# Altium PCB Controller R2.PcbDoc (part 2 of 3)
Units mil, origin at the board's own origin, x right, y up, seen from the top; angles counter-clockwise.
Board outline 3149.61 x 3149.61 mil, 4 copper layers (Top Layer, Inner 1, Inner 2, Bottom Layer), stack 70.112 mil thick; 128 components, 120 nets, 594 pads, 1557 vias.
Unrouted connection lines stored in the file: 130.
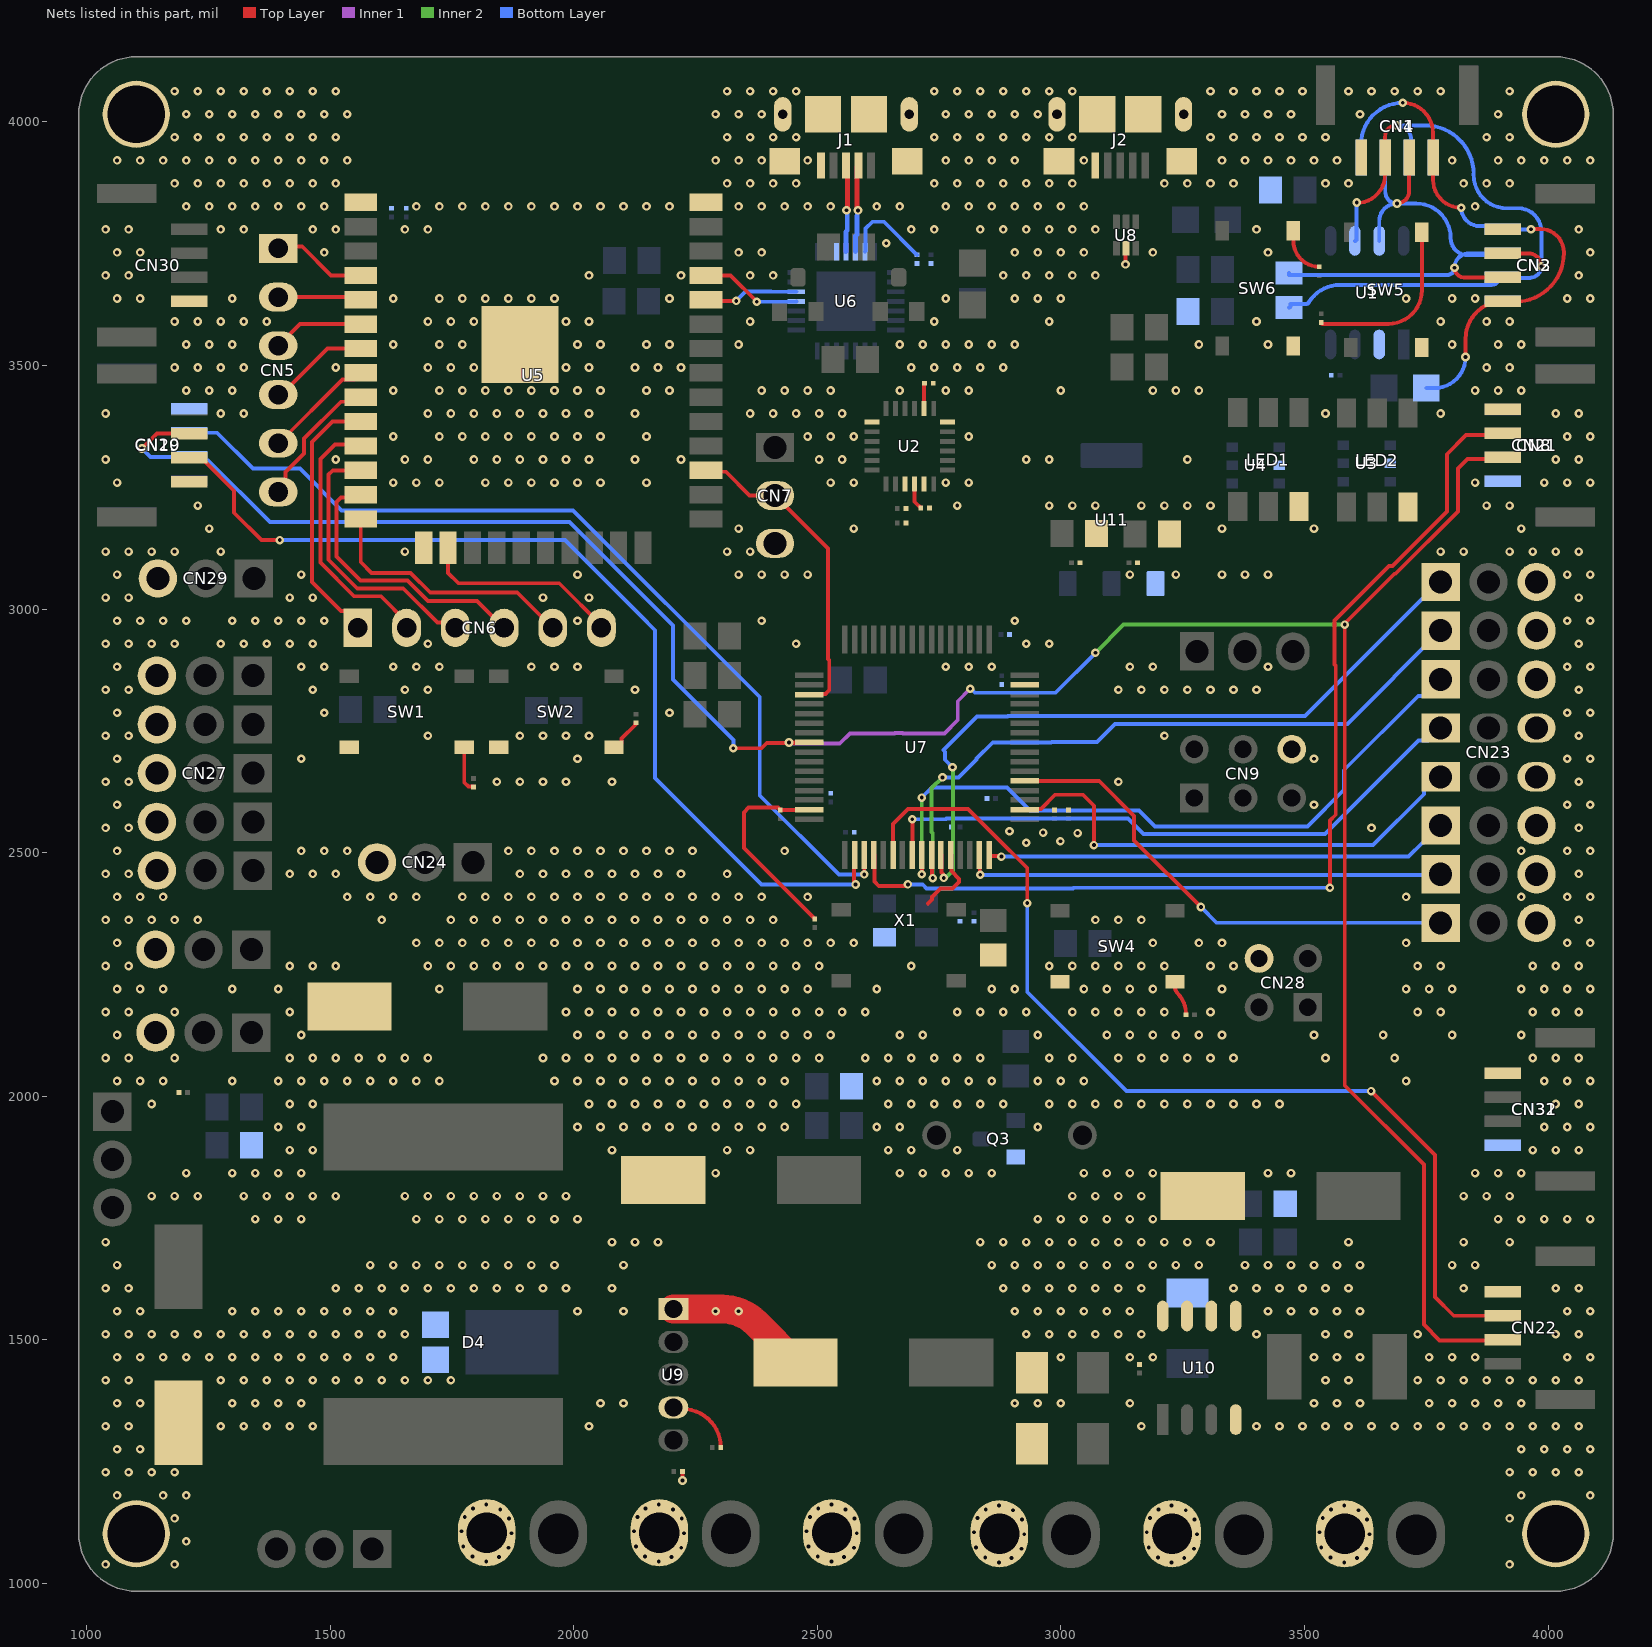
[diagram p4: the nets of this part, all layers, seen from the top]

## Via types
v1: diameter 17.72/17.72/17.72/17.72 (per signal layer), hole 7.87, Top Layer to Bottom Layer, tented both sides, 1234 vias
v2: diameter 17.72, hole 7.87, Top Layer to Bottom Layer, tented both sides, 176 vias
v3: diameter 10.87, hole 7.87, Top Layer to Bottom Layer, 138 vias
v4: diameter 10.87, hole 7.87, Top Layer to Bottom Layer, tented both sides, 6 vias
v5: diameter 50, hole 28, Top Layer to Bottom Layer, tented both sides, 2 vias
v6: diameter 78.74, hole 39.37, Top Layer to Bottom Layer, tented both sides, 1 vias

## Nets (pads, with @x,y where several pads share a name; then routed paths per layer and width w, separated by ;. In a path a pad name is that pad's centre, name@x,y a point inside that pad or via, vN(x,y) a via of type N, cw(c..) or ccw(c..) an arc to the next point about the centre after c; other vN are vias at no path point) (continued)
ESP_RX0: U5.34 U6.26 | length 194.2
  Top Layer w8: U5.34@2271.65,3635.04 2273.82,3632.87 v2(2333.66,3632.87)
  Bottom Layer w8: v2(2333.66,3632.87) 2352.55,3651.76 2405.26,3651.76 2405.45,3651.57 U6.26@2457.09,3651.57
ESP_TX: CN7.2 U5.27 U7.51 | length 653.4
  Top Layer w8: U5.27@2271.65,3285.04 2274.64,3282.06 2312.43,3282.06 2361.22,3233.27 CN7.2@2413.39,3233.27 2522.2,3124.46 2522.2,2897.97 2524.72,2895.44 2524.72,2834.06 2516.69,2826.04 2485.22,2826.04 U7.51@2483.72,2824.54
ESP_TX0: U5.35 U6.25 | length 208.3
  Top Layer w8: U5.35@2271.65,3685.04 2321.85,3685.04 v2(2375.98,3630.91)
  Bottom Layer w8: v2(2375.98,3630.91) 2456.1,3630.91 U6.25@2457.09,3631.89
ESP_USB_N: J1.2 U6.5 | length 180.6
  Top Layer w9.84: v2(2583.71,3818.57) 2582.2,3820.07 2582.2,3823.39 2581.77,3823.82 2581.77,3907.56 J1.2@2584.65,3910.43
  Bottom Layer w9.84: U6.5@2578.74,3733.86 2578.74,3766.34 2581.52,3769.12 2581.52,3807.02 2582.2,3807.7 2582.2,3817.06 v2(2583.71,3818.57)
ESP_USB_P: J1.3 U6.4 | length 180.5
  Top Layer w9.84: J1.3@2559.06,3910.43 2561.93,3907.56 2561.93,3823.82 2561.5,3823.39 2561.5,3820.4 v2(2559.99,3818.9)
  Bottom Layer w9.84: U6.4@2559.06,3733.86 2558.9,3734.02 2558.9,3774.56 2561.68,3777.34 2561.68,3807.18 2561.5,3807.37 2561.5,3817.39 v2(2559.99,3818.9)
GND: C1.1 C2.1 C3.1 C4.1 C5.1 C6.1 C7.1 C8.1 C9.1 C12.1 C13.1 C14.1 C15.1 C16.1 C17.1 C18.1 C19.1 C20.1 C21.1 C22.1 C23.2 C28.1 C29.2 C30.1 C31.1 C32.1 C33.1 C34.2 C35.2 C36.2 C38.1 C39.1 C40.1 C41.1 C42.2 CN1.4 CN2.4 CN3.4 CN4.4 CN7.3 CN8.4 CN9.6 CN10.K CN14.K CN15.K CN16.K CN17.K CN18.K CN19.4 CN20.4 CN21.4 CN22.4 CN23.N CN24.3 CN27.N CN28.4 CN29.3 CN30.4 CN31.4 CN32.4 D4.1 D4.2 D5.A J1.5 J1.S J2.5 J2.S LED1.3 LED2.3 pad.1@1102.36,4015.75 pad.2@4015.75,4015.75 pad.3@1141.73,2130.91 pad.3@1141.73,2301.18 pad.3@4015.75,1102.36 pad.4 Q3.2 R2.1 R11.1 R15.1 R18.2 R21.1 R24.2 SW1.3 SW2.3 SW4.3 SW5.3 SW6.3 U1.2 U2.1 U2.9 U2.11 U2.18 U3.2 U4.2 U5.1 U5.15 U5.38 U6.3 U7.12 U7.31 U7.63 U8.2 U9.1 U10.4 U10.5 U10.6 U10.7 U10.8 U11.1 X1.2 | length 914.7
  Top Layer w8: v2(2223.43,1211.61) 2223.43,1228.54 2222.63,1229.33 2222.63,1229.52 C28.1@2223.43,1230.32 ; U7.63@2483.72,2588.54 2482.79,2587.6 C15.1@2424.21,2587.6 2419.29,2592.52 2359.25,2592.52 2349.41,2582.68 2349.41,2509.84 C23.2@2495.08,2364.17 ; 2727.36,2395.67 2735.91,2404.21 2735.91,2409.01 2753.39,2426.5 2777.87,2426.5 2791.27,2439.89 2791.27,2446.52 2775.22,2462.57 2775.22,2494.04 U7.12@2773.72,2495.54 ; v2(3132.87,3707.68) 3133.06,3707.87 3133.06,3741.94 3133.86,3741.14 U8.2@3133.86,3740.55
  Top Layer w59.06: U9.1@2204.72,1563.39 2304.25,1563.39 cw(c2304.25,1463.39) 2374.96,1534.1 C42.2@2455.32,1453.74
  other v1: 1039.37,1039.37 1181.1,1039.37 3921.26,1039.37 1204.72,1086.61 1181.1,1133.86 3921.26,1133.86 1062.99,1181.1 1157.48,1181.1 1204.72,1181.1 3944.88,1181.1 4086.61,1181.1 1039.37,1228.35 1086.61,1228.35 1133.86,1228.35 1181.1,1228.35 3921.26,1228.35 3968.5,1228.35 4015.75,1228.35 4062.99,1228.35 1062.99,1275.59 1110.24,1275.59 3944.88,1275.59 3992.13,1275.59 4039.37,1275.59 4086.61,1275.59 1039.37,1322.83 1086.61,1322.83 1275.59,1322.83 1322.83,1322.83 1370.08,1322.83 1417.32,1322.83 1464.57,1322.83 2031.5,1322.83 3165.35,1322.83 3401.58,1322.83 3448.82,1322.83 3496.06,1322.83 3543.31,1322.83 3590.55,1322.83 3637.8,1322.83 3685.04,1322.83 3732.28,1322.83 3779.53,1322.83 3826.77,1322.83 3874.02,1322.83 3921.26,1322.83 3968.5,1322.83 4015.75,1322.83 4062.99,1322.83 1062.99,1370.08 1110.24,1370.08 1299.21,1370.08 1346.46,1370.08 1393.7,1370.08 1440.94,1370.08 2055.12,1370.08 2102.36,1370.08 2905.51,1370.08 2952.76,1370.08 3000,1370.08 3141.73,1370.08 3519.69,1370.08 3566.93,1370.08 3614.17,1370.08 3755.91,1370.08 3803.15,1370.08 3850.39,1370.08 3897.64,1370.08 3944.88,1370.08 1039.37,1417.32 1086.61,1417.32 1275.59,1417.32 1322.83,1417.32 1370.08,1417.32 1417.32,1417.32 1464.57,1417.32 1511.81,1417.32 1559.06,1417.32 1606.3,1417.32 1653.54,1417.32 1700.79,1417.32 1748.03,1417.32 3543.31,1417.32 3590.55,1417.32 3732.28,1417.32 3779.53,1417.32 3826.77,1417.32 3874.02,1417.32 3921.26,1417.32 3968.5,1417.32 4015.75,1417.32 4062.99,1417.32 1062.99,1464.57 1110.24,1464.57 1157.48,1464.57 1204.72,1464.57 1251.97,1464.57 1299.21,1464.57 1346.46,1464.57 1393.7,1464.57 1440.94,1464.57 1488.19,1464.57 1535.43,1464.57 1582.68,1464.57 1629.92,1464.57 3000,1464.57 3141.73,1464.57 3188.98,1464.57 3519.69,1464.57 3566.93,1464.57 3614.17,1464.57 3755.91,1464.57 3803.15,1464.57 3850.39,1464.57 4039.37,1464.57 4086.61,1464.57 1039.37,1511.81 1086.61,1511.81 1133.86,1511.81 1181.1,1511.81 1228.35,1511.81 1275.59,1511.81 1322.83,1511.81 1370.08,1511.81 1417.32,1511.81 1464.57,1511.81 1511.81,1511.81 1559.06,1511.81 1606.3,1511.81 1653.54,1511.81 2929.13,1511.81 2976.38,1511.81 3023.62,1511.81 3070.87,1511.81 3118.11,1511.81 3165.35,1511.81 3401.58,1511.81 3543.31,1511.81 3590.55,1511.81 3732.28,1511.81 4015.75,1511.81 4062.99,1511.81 1062.99,1559.06 1110.24,1559.06 1299.21,1559.06 1346.46,1559.06 1393.7,1559.06 1440.94,1559.06 1488.19,1559.06 1535.43,1559.06 1582.68,1559.06 1629.92,1559.06 2007.87,1559.06 2102.36,1559.06 2291.34,1559.06 2338.58,1559.06 2905.51,1559.06 2952.76,1559.06 3000,1559.06 3047.24,1559.06 3094.49,1559.06 3141.73,1559.06 3425.2,1559.06 3472.44,1559.06 3519.69,1559.06 3566.93,1559.06 3614.17,1559.06 4039.37,1559.06 4086.61,1559.06 1039.37,1606.3 1086.61,1606.3 1511.81,1606.3 1559.06,1606.3 1606.3,1606.3 1653.54,1606.3 1700.79,1606.3 1748.03,1606.3 1795.28,1606.3 1842.52,1606.3 1889.76,1606.3 1937.01,1606.3 1984.25,1606.3 2078.74,1606.3 2881.89,1606.3 2929.13,1606.3 2976.38,1606.3 3023.62,1606.3 3070.87,1606.3 3118.11,1606.3 3165.35,1606.3 3354.33,1606.3 3401.58,1606.3 3448.82,1606.3 3496.06,1606.3 3543.31,1606.3 3590.55,1606.3 3826.77,1606.3 4015.75,1606.3 4062.99,1606.3 1062.99,1653.54 1582.68,1653.54 1629.92,1653.54 1677.17,1653.54 1724.41,1653.54 1771.65,1653.54 1818.9,1653.54 1866.14,1653.54 1913.39,1653.54 1960.63,1653.54 2102.36,1653.54 2858.27,1653.54 2905.51,1653.54 2952.76,1653.54 3000,1653.54 3047.24,1653.54 3094.49,1653.54 3141.73,1653.54 3188.98,1653.54 3236.22,1653.54 3283.46,1653.54 3377.95,1653.54 3425.2,1653.54 3472.44,1653.54 3519.69,1653.54 3566.93,1653.54 3614.17,1653.54 3803.15,1653.54 3850.39,1653.54 1039.37,1700.79 2078.74,1700.79 2125.98,1700.79 2173.23,1700.79 2834.65,1700.79 2881.89,1700.79 2929.13,1700.79 2976.38,1700.79 3023.62,1700.79 3070.87,1700.79 3118.11,1700.79 3165.35,1700.79 3212.6,1700.79 3259.84,1700.79 3307.09,1700.79 3590.55,1700.79 3826.77,1700.79 3921.26,1700.79 1346.46,1748.03 1393.7,1748.03 1440.94,1748.03 1677.17,1748.03 1724.41,1748.03 1771.65,1748.03 1818.9,1748.03 1866.14,1748.03 1913.39,1748.03 1960.63,1748.03 2007.87,1748.03 2952.76,1748.03 3000,1748.03 3047.24,1748.03 3094.49,1748.03 3141.73,1748.03 3188.98,1748.03 3897.64,1748.03 3944.88,1748.03 3992.13,1748.03 4039.37,1748.03 4086.61,1748.03 1133.86,1795.28 1181.1,1795.28 1228.35,1795.28 1322.83,1795.28 1370.08,1795.28 1417.32,1795.28 1464.57,1795.28 1511.81,1795.28 1653.54,1795.28 1700.79,1795.28 1748.03,1795.28 1795.28,1795.28 1842.52,1795.28 1889.76,1795.28 1937.01,1795.28 1984.25,1795.28 3023.62,1795.28 3070.87,1795.28 3118.11,1795.28 3165.35,1795.28 3826.77,1795.28 3874.02,1795.28 3921.26,1795.28 1204.72,1842.52 1299.21,1842.52 1346.46,1842.52 1393.7,1842.52 1440.94,1842.52 2291.34,1842.52 2669.29,1842.52 2716.54,1842.52 2763.78,1842.52 2811.02,1842.52 2858.27,1842.52 3047.24,1842.52 3094.49,1842.52 3141.73,1842.52 3188.98,1842.52 3425.2,1842.52 3472.44,1842.52 3850.39,1842.52 3897.64,1842.52 3944.88,1842.52 1417.32,1889.76 1464.57,1889.76 2078.74,1889.76 2314.96,1889.76 2362.2,1889.76 2645.67,1889.76 2692.91,1889.76 2787.4,1889.76 3968.5,1889.76 4015.75,1889.76 4062.99,1889.76 1393.7,1937.01 1440.94,1937.01 2007.87,1937.01 2055.12,1937.01 2102.36,1937.01 2149.61,1937.01 2196.85,1937.01 2244.09,1937.01 2291.34,1937.01 2338.58,1937.01 2385.83,1937.01 2433.07,1937.01 2622.05,1937.01 2669.29,1937.01 2952.76,1937.01 3992.13,1937.01 4039.37,1937.01 4086.61,1937.01 1133.86,1984.25 1417.32,1984.25 1464.57,1984.25 2031.5,1984.25 2078.74,1984.25 2125.98,1984.25 2173.23,1984.25 2220.47,1984.25 2267.72,1984.25 2314.96,1984.25 2362.2,1984.25 2409.45,1984.25 2456.69,1984.25 2645.67,1984.25 2692.91,1984.25 2740.16,1984.25 2787.4,1984.25 2834.65,1984.25 2881.89,1984.25 2976.38,1984.25 3023.62,1984.25 3070.87,1984.25 3118.11,1984.25 3165.35,1984.25 3212.6,1984.25 3259.84,1984.25 3307.09,1984.25 3354.33,1984.25 3401.58,1984.25 3448.82,1984.25 4015.75,1984.25 4062.99,1984.25 1062.99,2031.5 1110.24,2031.5 1157.48,2031.5 1299.21,2031.5 1393.7,2031.5 1440.94,2031.5 1488.19,2031.5 1535.43,2031.5 1582.68,2031.5 1629.92,2031.5 1677.17,2031.5 1724.41,2031.5 1960.63,2031.5 2007.87,2031.5 2055.12,2031.5 2102.36,2031.5 2149.61,2031.5 2196.85,2031.5 2244.09,2031.5 2291.34,2031.5 2338.58,2031.5 2385.83,2031.5 2433.07,2031.5 2622.05,2031.5 2669.29,2031.5 2716.54,2031.5 2763.78,2031.5 2811.02,2031.5 2858.27,2031.5 2952.76,2031.5 3000,2031.5 3047.24,2031.5 3708.66,2031.5 3992.13,2031.5 4039.37,2031.5 4086.61,2031.5 1039.37,2078.74 1086.61,2078.74 1181.1,2078.74 1417.32,2078.74 1464.57,2078.74 1511.81,2078.74 1559.06,2078.74 1606.3,2078.74 1653.54,2078.74 1700.79,2078.74 1937.01,2078.74 1984.25,2078.74 2031.5,2078.74 2078.74,2078.74 2125.98,2078.74 2173.23,2078.74 2220.47,2078.74 2267.72,2078.74 2314.96,2078.74 2362.2,2078.74 2409.45,2078.74 2456.69,2078.74 2503.94,2078.74 2598.43,2078.74 2645.67,2078.74 2692.91,2078.74 2740.16,2078.74 2787.4,2078.74 2834.65,2078.74 2976.38,2078.74 3023.62,2078.74 3118.11,2078.74 3165.35,2078.74 3212.6,2078.74 3259.84,2078.74 3307.09,2078.74 3354.33,2078.74 3543.31,2078.74 3685.04,2078.74 3968.5,2078.74 4015.75,2078.74 4062.99,2078.74 1062.99,2125.98 1440.94,2125.98 2007.87,2125.98 2055.12,2125.98 2102.36,2125.98 2149.61,2125.98 2196.85,2125.98 2244.09,2125.98 2291.34,2125.98 2338.58,2125.98 2385.83,2125.98 2433.07,2125.98 2480.32,2125.98 2527.56,2125.98 2669.29,2125.98 2716.54,2125.98 2952.76,2125.98 3094.49,2125.98 3141.73,2125.98 3188.98,2125.98 3236.22,2125.98 3283.46,2125.98 3330.71,2125.98 3519.69,2125.98 3661.42,2125.98 3803.15,2125.98 3944.88,2125.98 1039.37,2173.23 1086.61,2173.23 1181.1,2173.23 1417.32,2173.23 1984.25,2173.23 2031.5,2173.23 2078.74,2173.23 2125.98,2173.23 2173.23,2173.23 2220.47,2173.23 2267.72,2173.23 2314.96,2173.23 2362.2,2173.23 2409.45,2173.23 2456.69,2173.23 2503.94,2173.23 2551.18,2173.23 2598.43,2173.23 2787.4,2173.23 2834.65,2173.23 2881.89,2173.23 2929.13,2173.23 3023.62,2173.23 3070.87,2173.23 3118.11,2173.23 3165.35,2173.23 3212.6,2173.23 3307.09,2173.23 3732.28,2173.23 3779.53,2173.23 3968.5,2173.23 4015.75,2173.23 4062.99,2173.23 1062.99,2220.47 1110.24,2220.47 1157.48,2220.47 1299.21,2220.47 1393.7,2220.47 1724.41,2220.47 2007.87,2220.47 2055.12,2220.47 2102.36,2220.47 2149.61,2220.47 2196.85,2220.47 2244.09,2220.47 2291.34,2220.47 2338.58,2220.47 2385.83,2220.47 2433.07,2220.47 2480.32,2220.47 2622.05,2220.47 2858.27,2220.47 2905.51,2220.47 3047.24,2220.47 3094.49,2220.47 3141.73,2220.47 3188.98,2220.47 3330.71,2220.47 3708.66,2220.47 3755.91,2220.47 3803.15,2220.47 3944.88,2220.47 3992.13,2220.47 4039.37,2220.47 4086.61,2220.47 1039.37,2267.72 1086.61,2267.72 1417.32,2267.72 1464.57,2267.72 1511.81,2267.72 1700.79,2267.72 1748.03,2267.72 1795.28,2267.72 1842.52,2267.72 1889.76,2267.72 1937.01,2267.72 1984.25,2267.72 2031.5,2267.72 2078.74,2267.72 2125.98,2267.72 2173.23,2267.72 2220.47,2267.72 2267.72,2267.72 2314.96,2267.72 2362.2,2267.72 2409.45,2267.72 2456.69,2267.72 2503.94,2267.72 2692.91,2267.72 2976.38,2267.72 3023.62,2267.72 3070.87,2267.72 3118.11,2267.72 3165.35,2267.72 3212.6,2267.72 3307.09,2267.72 3354.33,2267.72 3732.28,2267.72 3779.53,2267.72 3968.5,2267.72 4015.75,2267.72 4062.99,2267.72 1062.99,2314.96 1677.17,2314.96 1724.41,2314.96 1771.65,2314.96 1818.9,2314.96 1866.14,2314.96 1913.39,2314.96 1960.63,2314.96 2007.87,2314.96 2055.12,2314.96 2102.36,2314.96 2149.61,2314.96 2196.85,2314.96 2244.09,2314.96 2291.34,2314.96 2338.58,2314.96 2385.83,2314.96 2433.07,2314.96 2480.32,2314.96 2527.56,2314.96 2574.8,2314.96 3188.98,2314.96 3283.46,2314.96 3330.71,2314.96 3708.66,2314.96 4039.37,2314.96 4086.61,2314.96 1039.37,2362.2 1086.61,2362.2 1133.86,2362.2 1181.1,2362.2 1228.35,2362.2 1606.3,2362.2 1748.03,2362.2 1795.28,2362.2 1842.52,2362.2 1889.76,2362.2 1937.01,2362.2 1984.25,2362.2 2031.5,2362.2 2078.74,2362.2 2125.98,2362.2 2173.23,2362.2 2220.47,2362.2 2267.72,2362.2 2314.96,2362.2 2362.2,2362.2 2409.45,2362.2 3070.87,2362.2 3118.11,2362.2 3165.35,2362.2 4062.99,2362.2 1062.99,2409.45 1110.24,2409.45 1157.48,2409.45 1535.43,2409.45 1582.68,2409.45 1629.92,2409.45 1677.17,2409.45 1771.65,2409.45 1818.9,2409.45 1866.14,2409.45 1913.39,2409.45 1960.63,2409.45 2007.87,2409.45 2055.12,2409.45 2102.36,2409.45 2149.61,2409.45 2196.85,2409.45 2244.09,2409.45 2291.34,2409.45 2338.58,2409.45 2385.83,2409.45 2480.32,2409.45 3708.66,2409.45 3944.88,2409.45 4039.37,2409.45 4086.61,2409.45 1039.37,2456.69 1086.61,2456.69 1417.32,2456.69 1464.57,2456.69 1511.81,2456.69 1889.76,2456.69 1937.01,2456.69 1984.25,2456.69 2031.5,2456.69 2078.74,2456.69 2125.98,2456.69 2173.23,2456.69 2220.47,2456.69 2314.96,2456.69 4062.99,2456.69 1062.99,2503.94 1440.94,2503.94 1488.19,2503.94 1535.43,2503.94 1866.14,2503.94 1913.39,2503.94 1960.63,2503.94 2007.87,2503.94 2055.12,2503.94 2102.36,2503.94 2149.61,2503.94 2196.85,2503.94 2244.09,2503.94 2433.07,2503.94 3944.88,2503.94 4039.37,2503.94 4086.61,2503.94 1039.37,2551.18 1086.61,2551.18 3637.8,2551.18 4062.99,2551.18 1062.99,2598.43 3519.69,2598.43 4039.37,2598.43 4086.61,2598.43 1039.37,2645.67 1086.61,2645.67 1842.52,2645.67 1889.76,2645.67 1937.01,2645.67 1984.25,2645.67 2078.74,2645.67 3118.11,2645.67 4062.99,2645.67 1062.99,2692.91 1440.94,2692.91 2007.87,2692.91 3519.69,2692.91 4039.37,2692.91 4086.61,2692.91 1039.37,2740.16 1086.61,2740.16 1700.79,2740.16 1889.76,2740.16 1937.01,2740.16 1984.25,2740.16 2031.5,2740.16 3212.6,2740.16 4062.99,2740.16 1062.99,2787.4 1488.19,2787.4 2196.85,2787.4 4039.37,2787.4 4086.61,2787.4 1039.37,2834.65 1086.61,2834.65 1464.57,2834.65 1653.54,2834.65 1700.79,2834.65 2125.98,2834.65 3118.11,2834.65 3165.35,2834.65 3212.6,2834.65 3259.84,2834.65 3307.09,2834.65 3354.33,2834.65 3401.58,2834.65 4062.99,2834.65 1062.99,2881.89 1440.94,2881.89 1488.19,2881.89 1629.92,2881.89 1677.17,2881.89 1724.41,2881.89 1913.39,2881.89 1960.63,2881.89 2007.87,2881.89 2763.78,2881.89 2811.02,2881.89 2858.27,2881.89 3141.73,2881.89 3188.98,2881.89 3425.2,2881.89 4039.37,2881.89 4086.61,2881.89 1039.37,2929.13 1086.61,2929.13 1133.86,2929.13 1181.1,2929.13 1275.59,2929.13 1322.83,2929.13 1370.08,2929.13 1417.32,2929.13 1464.57,2929.13 1700.79,2929.13 2456.69,2929.13 2929.13,2929.13 2976.38,2929.13 4062.99,2929.13 1062.99,2976.38 1110.24,2976.38 1157.48,2976.38 1204.72,2976.38 1299.21,2976.38 1346.46,2976.38 1393.7,2976.38 1440.94,2976.38 1488.19,2976.38 2007.87,2976.38 2385.83,2976.38 2905.51,2976.38 4039.37,2976.38 4086.61,2976.38 1039.37,3023.62 1086.61,3023.62 1417.32,3023.62 1464.57,3023.62 1937.01,3023.62 2031.5,3023.62 4062.99,3023.62 1062.99,3070.87 1440.94,3070.87 2007.87,3070.87 2338.58,3070.87 2385.83,3070.87 2433.07,3070.87 2480.32,3070.87 3141.73,3070.87 3236.22,3070.87 3330.71,3070.87 3377.95,3070.87 3425.2,3070.87 4039.37,3070.87 4086.61,3070.87 1039.37,3118.11 1086.61,3118.11 1133.86,3118.11 1181.1,3118.11 1275.59,3118.11 1653.54,3118.11 2314.96,3118.11 2362.2,3118.11 3779.53,3118.11 3826.77,3118.11 3921.26,3118.11 3968.5,3118.11 4015.75,3118.11 4062.99,3118.11 1251.97,3165.35 2338.58,3165.35 2574.8,3165.35 3330.71,3165.35 3519.69,3165.35 3944.88,3165.35 1228.35,3212.6 2787.4,3212.6 2976.38,3212.6 3023.62,3212.6 3070.87,3212.6 3165.35,3212.6 3212.6,3212.6 3259.84,3212.6 3307.09,3212.6 3874.02,3212.6 3921.26,3212.6 1062.99,3259.84 1629.92,3259.84 1677.17,3259.84 1724.41,3259.84 1818.9,3259.84 1866.14,3259.84 1913.39,3259.84 1960.63,3259.84 2007.87,3259.84 2055.12,3259.84 2149.61,3259.84 2527.56,3259.84 2574.8,3259.84 2763.78,3259.84 2811.02,3259.84 3850.39,3259.84 3992.13,3259.84 4039.37,3259.84 4086.61,3259.84 1039.37,3307.09 1511.81,3307.09 1653.54,3307.09 1700.79,3307.09 1795.28,3307.09 1842.52,3307.09 1889.76,3307.09 1937.01,3307.09 1984.25,3307.09 2031.5,3307.09 2125.98,3307.09 2220.47,3307.09 2503.94,3307.09 2551.18,3307.09 2929.13,3307.09 2976.38,3307.09 3259.84,3307.09 4015.75,3307.09 4062.99,3307.09 1629.92,3354.33 1724.41,3354.33 1771.65,3354.33 1818.9,3354.33 1866.14,3354.33 1913.39,3354.33 1960.63,3354.33 2007.87,3354.33 2055.12,3354.33 2149.61,3354.33 2480.32,3354.33 2527.56,3354.33 2574.8,3354.33 2811.02,3354.33 4039.37,3354.33 4086.61,3354.33 1039.37,3401.58 1275.59,3401.58 1322.83,3401.58 1700.79,3401.58 1748.03,3401.58 1795.28,3401.58 1842.52,3401.58 1889.76,3401.58 1937.01,3401.58 1984.25,3401.58 2031.5,3401.58 2125.98,3401.58 2362.2,3401.58 2409.45,3401.58 2456.69,3401.58 2503.94,3401.58 2551.18,3401.58 3543.31,3401.58 3779.53,3401.58 4015.75,3401.58 4062.99,3401.58 1204.72,3448.82 1251.97,3448.82 1299.21,3448.82 1629.92,3448.82 1724.41,3448.82 1771.65,3448.82 1818.9,3448.82 1866.14,3448.82 1913.39,3448.82 1960.63,3448.82 2007.87,3448.82 2055.12,3448.82 2149.61,3448.82 2196.85,3448.82 2385.83,3448.82 2433.07,3448.82 2480.32,3448.82 2527.56,3448.82 2669.29,3448.82 2763.78,3448.82 2811.02,3448.82 3000,3448.82 3188.98,3448.82 3236.22,3448.82 3283.46,3448.82 3850.39,3448.82 3897.64,3448.82 3944.88,3448.82 1181.1,3496.06 1228.35,3496.06 1275.59,3496.06 1322.83,3496.06 1511.81,3496.06 1700.79,3496.06 1748.03,3496.06 1795.28,3496.06 1984.25,3496.06 2031.5,3496.06 2125.98,3496.06 2173.23,3496.06 2220.47,3496.06 2692.91,3496.06 2740.16,3496.06 2787.4,3496.06 2834.65,3496.06 2881.89,3496.06 3874.02,3496.06 3921.26,3496.06 1204.72,3543.31 1251.97,3543.31 1299.21,3543.31 1629.92,3543.31 1724.41,3543.31 1771.65,3543.31 2007.87,3543.31 2055.12,3543.31 2149.61,3543.31 2196.85,3543.31 2338.58,3543.31 2669.29,3543.31 2716.54,3543.31 2763.78,3543.31 2811.02,3543.31 2858.27,3543.31 2905.51,3543.31 3283.46,3543.31 3425.2,3543.31 3803.15,3543.31 3897.64,3543.31 3944.88,3543.31 1181.1,3590.55 1228.35,3590.55 1275.59,3590.55 1322.83,3590.55 1370.08,3590.55 1700.79,3590.55 1748.03,3590.55 1795.28,3590.55 1984.25,3590.55 2031.5,3590.55 2362.2,3590.55 2740.16,3590.55 2976.38,3590.55 3401.58,3590.55 3779.53,3590.55 3874.02,3590.55 3921.26,3590.55 1062.99,3637.8 1110.24,3637.8 1299.21,3637.8 1629.92,3637.8 1724.41,3637.8 1771.65,3637.8 1818.9,3637.8 1866.14,3637.8 1913.39,3637.8 1960.63,3637.8 2196.85,3637.8 2763.78,3637.8 2905.51,3637.8 2952.76,3637.8 3000,3637.8 3708.66,3637.8 3803.15,3637.8 3850.39,3637.8 4039.37,3637.8 4086.61,3637.8 1039.37,3685.04 1086.61,3685.04 2031.5,3685.04 2220.47,3685.04 2362.2,3685.04 2409.45,3685.04 2881.89,3685.04 2929.13,3685.04 2976.38,3685.04 3023.62,3685.04 3070.87,3685.04 4062.99,3685.04 1062.99,3732.28 1110.24,3732.28 1488.19,3732.28 2338.58,3732.28 2385.83,3732.28 2905.51,3732.28 2952.76,3732.28 3000,3732.28 3047.24,3732.28 3188.98,3732.28 3425.2,3732.28 4086.61,3732.28 1039.37,3779.53 1086.61,3779.53 1275.59,3779.53 1322.83,3779.53 1464.57,3779.53 1511.81,3779.53 1653.54,3779.53 1700.79,3779.53 2692.91,3779.53 2740.16,3779.53 2834.65,3779.53 2881.89,3779.53 2929.13,3779.53 2976.38,3779.53 3023.62,3779.53 3070.87,3779.53 3401.58,3779.53 4062.99,3779.53 1204.72,3826.77 1251.97,3826.77 1299.21,3826.77 1346.46,3826.77 1393.7,3826.77 1440.94,3826.77 1488.19,3826.77 1677.17,3826.77 1724.41,3826.77 1771.65,3826.77 1818.9,3826.77 1866.14,3826.77 1913.39,3826.77 1960.63,3826.77 2007.87,3826.77 2055.12,3826.77 2102.36,3826.77 2149.61,3826.77 2196.85,3826.77 2338.58,3826.77 2385.83,3826.77 2433.07,3826.77 2480.32,3826.77 2527.56,3826.77 2622.05,3826.77 2669.29,3826.77 2763.78,3826.77 2811.02,3826.77 2858.27,3826.77 2905.51,3826.77 2952.76,3826.77 3000,3826.77 3047.24,3826.77 3850.39,3826.77 1181.1,3874.02 1228.35,3874.02 1275.59,3874.02 1322.83,3874.02 1370.08,3874.02 1417.32,3874.02 1464.57,3874.02 1511.81,3874.02 2314.96,3874.02 2362.2,3874.02 2409.45,3874.02 2456.69,3874.02 2740.16,3874.02 2787.4,3874.02 2834.65,3874.02 2881.89,3874.02 2929.13,3874.02 2976.38,3874.02 3023.62,3874.02 3212.6,3874.02 3259.84,3874.02 3307.09,3874.02 3354.33,3874.02 3543.31,3874.02 3590.55,3874.02 3826.77,3874.02 3874.02,3874.02 3921.26,3874.02 1062.99,3921.26 1110.24,3921.26 1157.48,3921.26 1204.72,3921.26 1251.97,3921.26 1299.21,3921.26 1346.46,3921.26 1393.7,3921.26 1440.94,3921.26 1488.19,3921.26 1535.43,3921.26 2291.34,3921.26 2338.58,3921.26 2385.83,3921.26 2480.32,3921.26 2763.78,3921.26 2811.02,3921.26 2858.27,3921.26 2905.51,3921.26 3047.24,3921.26 3330.71,3921.26 3377.95,3921.26 3425.2,3921.26 3472.44,3921.26 3519.69,3921.26 3566.93,3921.26 3803.15,3921.26 3897.64,3921.26 3944.88,3921.26 3992.13,3921.26 4039.37,3921.26 4086.61,3921.26 1181.1,3968.5 1228.35,3968.5 1275.59,3968.5 1322.83,3968.5 1370.08,3968.5 1417.32,3968.5 1464.57,3968.5 1511.81,3968.5 2314.96,3968.5 2362.2,3968.5 2409.45,3968.5 2456.69,3968.5 2740.16,3968.5 2787.4,3968.5 2834.65,3968.5 2881.89,3968.5 2929.13,3968.5 2976.38,3968.5 3023.62,3968.5 3307.09,3968.5 3354.33,3968.5 3401.58,3968.5 3448.82,3968.5 3496.06,3968.5 3543.31,3968.5 3874.02,3968.5 3921.26,3968.5 1204.72,4015.75 1251.97,4015.75 1299.21,4015.75 1346.46,4015.75 1393.7,4015.75 1440.94,4015.75 1488.19,4015.75 1535.43,4015.75 2291.34,4015.75 2338.58,4015.75 2385.83,4015.75 2763.78,4015.75 2811.02,4015.75 2858.27,4015.75 2905.51,4015.75 2952.76,4015.75 3330.71,4015.75 3377.95,4015.75 3425.2,4015.75 3472.44,4015.75 3614.17,4015.75 3897.64,4015.75 1181.1,4062.99 1228.35,4062.99 1275.59,4062.99 1322.83,4062.99 1370.08,4062.99 1417.32,4062.99 1464.57,4062.99 1511.81,4062.99 2314.96,4062.99 2362.2,4062.99 2409.45,4062.99 2456.69,4062.99 2740.16,4062.99 2787.4,4062.99 2834.65,4062.99 2881.89,4062.99 2929.13,4062.99 2976.38,4062.99 3023.62,4062.99 3307.09,4062.99 3354.33,4062.99 3401.58,4062.99 3448.82,4062.99 3496.06,4062.99 3590.55,4062.99 3637.8,4062.99 3685.04,4062.99 3732.28,4062.99 3779.53,4062.99 3921.26,4062.99
  other v2: 2929.13,2520.67 2999.02,2523.62 3034.45,2540.35 2963.58,2541.34 2894.68,2544.29 2641.73,3750.98
  other v3: 2873.02,1043.36 3227.35,1043.36 3581.68,1043.36 1820.5,1045.36 2174.83,1045.36 2529.17,1045.36 2899.02,1052.36 3253.35,1052.36 3607.68,1052.36 2845.02,1053.36 3199.35,1053.36 3553.68,1053.36 1846.5,1054.36 2200.83,1054.36 2555.17,1054.36 1792.5,1055.36 2146.83,1055.36 2501.17,1055.36 2919.02,1071.36 3273.35,1071.36 3627.68,1071.36 1866.5,1073.36 2220.83,1073.36 2575.17,1073.36 2826.02,1074.36 3180.35,1074.36 3534.68,1074.36 1773.5,1076.36 2127.83,1076.36 2482.17,1076.36 2925.02,1101.36 3279.35,1101.36 3633.68,1101.36 1872.5,1103.36 2226.83,1103.36 2581.17,1103.36 2822.02,1105.36 3176.35,1105.36 3530.68,1105.36 1769.5,1107.36 2123.83,1107.36 2478.17,1107.36 2920.02,1131.36 3274.35,1131.36 3628.68,1131.36 1867.5,1133.36 2221.83,1133.36 2576.17,1133.36 2829.02,1134.36 3183.35,1134.36 3537.68,1134.36 1776.5,1136.36 2130.83,1136.36 2485.17,1136.36 2902.02,1150.36 3256.35,1150.36 3610.68,1150.36 1849.5,1152.36 2203.83,1152.36 2558.17,1152.36 2846.02,1152.36 3200.35,1152.36 3554.68,1152.36 1793.5,1154.36 2147.83,1154.36 2502.17,1154.36 2873.02,1160.36 3227.35,1160.36 3581.68,1160.36 1820.5,1162.36 2174.83,1162.36 2529.17,1162.36
NetC4_2: C4.2 U2.20 | length 51.8
  Top Layer w8: U2.20@2719.49,3412.2 2719.49,3462.6 C4.2@2720.47,3463.58
NetC5_2: C5.2 U2.10 | length 54.7
  Top Layer w8: U2.10@2699.8,3257.09 2699.8,3220.47 C5.2@2712.6,3207.68
NetC8_2: C8.2 U6.6 | length 187.2
  Bottom Layer w8: U6.6@2598.43,3733.86 2599.43,3734.86 2599.43,3781.59 2613.11,3795.28 2636.81,3795.28 C8.2@2704.72,3727.36
NetC10_1: C10.1 SW1.4 | length 94.8
  Top Layer w8: SW1.4@1775.59,2716.54 1775.59,2644.45 1784.4,2635.64 1793.5,2635.64 C10.1@1794.29,2634.84
NetC11_1: C11.1 SW2.4 | length 73.6
  Top Layer w8: SW2.4@2082.68,2716.54 2082.68,2718.5 2084.65,2720.47 2092.52,2720.47 2098.36,2726.32 2098.36,2734.19 2127.03,2762.86 2127.03,2765.81 C11.1@2127.95,2766.73
NetC24_1: C24.1 SW4.4 | length 74
  Top Layer w8: SW4.4@3234.25,2235.24 3234.25,2224.89 ccw(c3254.41,2224.89) 3240.16,2210.63 cw(c3199.76,2170.23) 3256.89,2170.23 C24.1@3256.89,2167.32
NetC25_1: C25.1 SW5.4 | length 366.8
  Top Layer w8: C25.1@3534.45,3588.58 ccw(c3537.4,3588.58) 3537.4,3585.63 3672.24,3585.63 ccw(c3672.24,3654.53) 3741.14,3654.53 SW5.4@3741.14,3773.62
NetC26_1: C26.1 SW6.4 | length 104.2
  Top Layer w8: SW6.4@3477.36,3776.57 3477.36,3755.91 ccw(c3530.51,3755.91) C26.1@3530.51,3702.76
NetC27_1: C27.1 U9.4 | length 147.1
  Top Layer w8: U9.4@2204.72,1361.42 ccw(c2204.72,1360.43) 2203.74,1360.43 2203.74,1358.27 2223.43,1358.27 cw(c2223.43,1279.53) C27.1@2302.17,1279.53
NetCN1_1: CN1.1 CN2.1 CN3.1 CN4.1 D1.K | length 1174.6
  Top Layer w8: v2(3701.77,4039.37) cw(c3701.77,3977.2) 3763.94,3977.2 CN4.1@3763.94,3927.12 3763.94,3881.72 ccw(c3821.85,3881.72) v2(3821.85,3823.82) ; v2(3830.71,3517.72) 3830.71,3555.16 cw(c3907.44,3555.16) CN3.1@3907.44,3631.89 3925.2,3631.89 cw(c3925.2,3630.91) 3926.18,3630.91 3932.48,3630.91 ccw(c3932.48,3730.91) 4032.48,3730.91 4032.48,3732.28 ccw(c3984.25,3732.28) 3984.25,3780.51 3970.47,3780.51 3970.08,3780.33 cw(c3966.89,3787.66) 3966.89,3779.66 v2(3965.05,3779.66)
  Inner 1 w8: v2(3965.05,3779.66) cw(c3965.89,3779.66) 3965.89,3780.51 v2@3970.47,3780.51
  Bottom Layer w8: CN1.1@3616.67,3927.12 3616.14,3927.12 3616.14,3953.74 cw(c3701.77,3953.74) v2(3701.77,4039.37) ; D1.K@3750,3453.74 3766.73,3453.74 ccw(c3766.73,3517.72) v2(3830.71,3517.72) ; v2(3821.85,3823.82) ccw(c3859.25,3823.82) 3859.25,3786.42 3893.7,3786.42 ccw(c3900.59,3786.42) 3900.59,3779.53 CN2.1@3907.44,3779.53 3907.44,3779.66 v2(3965.05,3779.66)
NetCN1_2: CN1.2 CN2.2 CN3.2 CN4.2 R1.2 U1.7 | length 1157.8
  Top Layer w8: v2(3689.96,3832.68) ccw(c3689.96,3857.45) 3714.73,3857.45 CN4.2@3714.73,3927.12 ; v2(3808.07,3700.79) ccw(c3827.76,3700.79) 3827.76,3681.1 CN3.2@3907.44,3681.1
  Bottom Layer w8: R1.2@3468.5,3689.96 3468.5,3686.02 3793.31,3686.02 ccw(c3793.31,3700.79) v2(3808.07,3700.79) cw(c3837.6,3700.79) 3825.68,3727.8 ; U1.7@3653.54,3755.91 3653.54,3796.26 cw(c3689.96,3796.26) v2(3689.96,3832.68) ; CN1.2@3665.88,3927.12 3665.88,3856.76 ccw(c3689.96,3856.76) v2(3689.96,3832.68) ; CN2.2@3907.44,3730.32 CN2.2@3891.73,3730.32 ; v2(3689.96,3832.68) 3729.33,3832.68 cw(c3729.33,3761.81) 3800.2,3761.81 ccw(c3835.63,3761.81) 3825.68,3727.8 ; 3825.68,3727.8 ccw(c3835.63,3761.81) 3835.63,3726.38 3887.8,3726.38 cw(c3891.73,3726.38) CN2.2@3891.73,3730.32 ; 3825.68,3727.8 cw(c3837.6,3700.79) 3837.6,3730.32 CN2.2@3891.73,3730.32
NetCN1_3: CN1.3 CN2.3 CN3.3 CN4.3 R1.1 U1.6 | length 1522.3
  Top Layer w8: v2(3607.28,3834.65) 3607.28,3833.66 ccw(c3607.28,3891.9) 3665.52,3891.9 CN4.3@3665.52,3927.12 3665.52,3969.65 cw(c3688.98,3969.65) v2(3688.98,3993.11) ; CN3.3@3907.44,3730.32 3959.65,3730.32 cw(c3959.65,3703.74) v2(3986.22,3703.74)
  Bottom Layer w8: R1.1@3468.5,3619.09 ccw(c3468.5,3622.05) 3471.46,3622.05 3471.46,3625.98 3502.04,3625.98 ccw(c3502.04,3633.98) 3508.86,3629.8 cw(c3572.83,3590.55) 3572.83,3665.61 3884.58,3665.61 ccw(c3884.58,3681.1) 3900.08,3681.1 CN2.3@3907.44,3681.1 3927.17,3681.1 cw(c3927.17,3680.12) 3928.15,3680.12 3962.6,3680.12 ccw(c3962.6,3703.74) v2(3986.22,3703.74) 3986.22,3775.59 ccw(c3938.98,3775.59) 3938.98,3822.83 3915.35,3822.83 cw(c3915.35,3890.75) 3847.44,3890.75 3847.44,3893.11 ccw(c3747.44,3893.11) 3747.44,3993.11 v2(3688.98,3993.11) cw(c3688.98,3962.6) 3719.49,3962.6 3719.49,3931.51 cw(c3715.09,3931.51) CN1.3@3715.09,3927.12 ; U1.6@3603.54,3755.91 ccw(c3603.54,3759.65) 3607.28,3759.65 v2(3607.28,3834.65)
NetCN5_1: CN5.1 U5.4 | length 195.2
  Top Layer w8: CN5.1@1393.7,3740.55 1398.03,3740.55 1401.57,3744.09 1442.91,3744.09 1501.97,3685.04 U5.4@1562.99,3685.04
NetCN5_2: CN5.2 U5.5 | length 171.6
  Top Layer w8: CN5.2@1393.7,3640.55 1557.48,3640.55 U5.5@1562.99,3635.04
NetCN5_3: CN5.3 U5.6 | length 187.7
  Top Layer w8: CN5.3@1393.7,3540.55 1438.19,3585.04 U5.6@1562.99,3585.04
NetCN5_4: CN5.4 U5.7 | length 208.4
  Top Layer w8: CN5.4@1393.7,3440.55 1400.2,3440.55 1494.69,3535.04 U5.7@1562.99,3535.04
NetCN5_5: CN5.5 U5.8 | length 229.1
  Top Layer w8: CN5.5@1393.7,3340.55 1394.69,3340.55 1525.46,3471.32 1549.28,3471.32 U5.8@1562.99,3485.04
NetCN5_6: CN5.6 U5.9 | length 283.1
  Top Layer w8: CN5.6@1393.7,3240.55 1408.3,3255.15 1408.3,3281.33 1446.85,3319.88 1446.85,3350.39 1522.21,3425.76 1553.71,3425.76 U5.9@1562.99,3435.04
NetCN6_1: CN6.1 U5.10 | length 543.4
  Top Layer w8: CN6.1@1557.09,2961.61 1557.09,2971.02 1531.56,2996.55 1522.15,2996.55 1462.85,3055.85 1462.85,3342.77 1505.12,3385.04 U5.10@1562.99,3385.04
NetCN6_2: CN6.2 U5.11 | length 547.9
  Top Layer w8: U5.11@1562.99,3335.04 1560.63,3335.04 1558.07,3337.6 1509.84,3337.6 1480.32,3308.07 1480.32,3095.47 1549.21,3026.57 1604.33,3026.57 1657.09,2973.82 CN6.2@1657.09,2961.61
NetCN6_3: CN6.3 U5.12 | length 562.6
  Top Layer w8: U5.12@1562.99,3285.04 1505.51,3285.04 1497.05,3276.57 1497.05,3101.38 1555.85,3042.57 1650.34,3042.57 1720.25,2972.67 1746.03,2972.67 CN6.3@1757.09,2961.61
NetCN6_4: CN6.4 U5.13 | length 572.7
  Top Layer w8: U5.13@1562.99,3235.04 1556.86,3228.91 1522.21,3228.91 1513.05,3219.74 1513.05,3108.01 1562.48,3058.57 1658.94,3058.57 1700.79,3016.73 1801.97,3016.73 CN6.4@1857.09,2961.61
NetCN6_5: CN6.5 U5.14 | length 538.5
  Top Layer w8: U5.14@1562.99,3185.04 1562.99,3096.46 1584.87,3074.57 1665.57,3074.57 1705.7,3034.45 1884.25,3034.45 CN6.5@1957.09,2961.61
NetCN6_6: CN6.6 U5.16 | length 415.8
  Top Layer w8: U5.16@1742.32,3125.98 1742.32,3074.61 1763.78,3053.15 1970.47,3053.15 2057.09,2966.54 CN6.6@2057.09,2961.61
NetCN19_2: CN19.2 CN20.2 CN21.2 CN22.2 U7.56 | length 5337.7
  Top Layer w8: v2(1114.17,3329.72) 1144.85,3360.4 CN19.2@1210.67,3360.4 1219.32,3360.4 CN19.2@1221.46,3358.27 ; v2(2327.76,2714.57) 2385.83,2714.57 2396.3,2725.04 2482.22,2725.04 2480.8,2726.46 2442.01,2726.46 v2(2441.93,2726.38) ; CN22.2@3907.43,1500.53 3905.92,1499.02 3777.56,1499.02 3745.08,1531.5 3745.08,1860.24 3582.68,2022.64 3582.68,2970.44 3684.98,3072.74 3687.13,3072.74 3814.96,3200.57 3814.96,3288.39 3834.65,3308.07 3903.96,3308.07 CN21.2@3907.44,3311.55
  Inner 1 w8: v2(2441.93,2726.38) 2443.79,2724.52 2450.66,2724.52 2450.77,2724.41 2546.26,2724.41 2566.93,2745.08 2658.66,2745.08 2659.53,2745.95 2675.12,2745.95 2675.99,2745.08 2760.83,2745.08 2788.39,2772.64 2788.39,2811.02 v2(2813.98,2836.61)
  Inner 2 w8: v2(3070.87,2910.43) 3128.72,2968.29 v2(3582.68,2968.29)
  Bottom Layer w8: v2(1114.17,3329.72) 1131.89,3312.01 1210.63,3312.01 1210.68,3312.06 CN20.2@1210.68,3312.83 1218.49,3305.02 1250.1,3305.02 1376.53,3178.59 1991.68,3178.59 2203.74,2966.54 2203.74,2855.32 2327.76,2731.3 v2(2327.76,2714.57) ; v2(2813.98,2836.61) 2815.46,2836.61 2823.52,2828.55 2988.98,2828.55 v2(3070.87,2910.43)
NetCN19_3: CN19.3 U7.2 | length 2001.1
  Top Layer w8: CN19.3@1207.84,3311.19 CN19.3@1210.67,3311.19 1235.07,3311.19 1236.22,3310.04 1237.41,3310.04 1244.07,3303.38 1244.07,3302.19 1303.15,3243.11 1303.15,3197.83 1359.25,3141.73 v2(1396.65,3141.73) ; U7.2@2576.72,2495.54 2575.6,2494.41 2575.6,2440.62 2578.74,2437.48 v2(2578.74,2434.85)
  Bottom Layer w8: v2(1396.65,3141.73) 1982.29,3141.73 2137.31,2986.72 2167.32,2956.7 2167.32,2653.54 2386.02,2434.85 v2(2578.74,2434.85)
NetCN20_3: CN20.3 U7.3 | length 1919.3
  Top Layer w8: v2(2596.46,2455.71) 2596.59,2455.84 2596.59,2495.4 U7.3@2596.72,2495.54
  Bottom Layer w8: CN20.3@1210.68,3362.04 1267.88,3362.04 1341.54,3288.39 1437.99,3288.39 1523.62,3202.76 1998.99,3202.76 2382.08,2819.66 2382.08,2617.92 2544.29,2455.71 v2(2596.46,2455.71)
NetCN21_3: CN21.3 U7.4 | length 2127.1
  Top Layer w8: U7.4@2615.72,2495.54 2617.22,2494.04 2617.22,2464.44 2617.32,2464.35 2617.32,2440.79 2626.2,2431.9 2680.25,2431.9 2683.39,2435.04 v2(2686.02,2435.04) ; v2(3552.17,2428.15) 3552.17,2565.94 3564.23,2578.01 3564.23,2884.36 3561.82,2886.77 3561.82,2976.93 3673.64,3088.74 3680.51,3088.74 3792.32,3200.56 3792.32,3317.91 3831.69,3357.28 3891.73,3357.28 3895.21,3360.76 CN21.3@3907.44,3360.76
  Bottom Layer w8: v2(2686.02,2435.04) 2716.66,2435.04 2724.65,2427.05 3025.04,2427.05 3026.14,2428.15 v2(3552.17,2428.15)
NetCN22_3: CN22.3 U7.6 | length 2078.3
  Top Layer w8: U7.6@2655.72,2495.54 2655.72,2559.24 2686.24,2589.76 2809.85,2589.76 2863.07,2536.54 2863.19,2536.54 2931.1,2468.63 v2(2931.1,2396.65) ; v2(3636.81,2010.83) 3767.72,1879.92 3767.72,1588.58 3806.56,1549.74 CN22.3@3907.43,1549.74
  Bottom Layer w8: v2(2931.1,2396.65) 2931.1,2214.57 3134.84,2010.83 v2(3636.81,2010.83)
NetCN23_1: CN23.1 U7.21 | length 1004
  Top Layer w8: U7.21@2925.72,2647.54 3078.84,2647.54 3150.59,2575.79 3150.59,2525.59 v2(3287.4,2388.78)
  Bottom Layer w8: v2(3287.4,2388.78) 3319.88,2356.3 3776.57,2356.3 3776.97,2355.91 CN23.1@3779.53,2355.91
NetCN23_2: CN23.2 U7.15 | length 987
  Top Layer w8: U7.15@2832.72,2495.54 2833.68,2494.57 2833.68,2455.69 v2(2834.65,2454.72)
  Bottom Layer w8: v2(2834.65,2454.72) 3768.7,2454.72 3769.88,2455.91 CN23.2@3779.53,2455.91
NetCN23_3: CN23.3 U7.16 | length 956.4
  Top Layer w8: U7.16@2852.72,2495.54 2852.72,2494.61 2854.22,2493.11 2877.12,2493.11 v2(2878.03,2492.2)
  Bottom Layer w8: v2(2878.03,2492.2) 2878.11,2492.13 3713.58,2492.13 3741.99,2520.54 3744.16,2520.54 3775.59,2551.97 3775.59,2554.13 3777.36,2555.91 CN23.3@3779.53,2555.91
NetCN23_4: CN23.4 U7.18 | length 1029.9
  Top Layer w8: U7.18@2925.72,2588.54 2927.22,2590.04 2959.13,2590.04 2988.19,2619.09 3045.28,2619.09 3067.91,2596.46 v2(3067.91,2515.75) ; CN23.4@3776.57,2649.61 3779.53,2652.56 CN23.4@3779.53,2655.91
  Bottom Layer w8: v2(3067.91,2515.75) 3640.75,2515.75 3745.05,2620.05 3745.05,2629.91 3770.65,2655.51 3780.51,2655.51 3780.12,2655.91 CN23.4@3779.53,2655.91
NetCN23_5: CN23.5 U7.8 | length 1262.8
  Top Layer w8: U7.8@2694.72,2495.54 2694.72,2499.84 2695.87,2500.98 2695.87,2567.91 v2(2694.88,2568.9)
  Bottom Layer w8: v2(2694.88,2568.9) 2764.53,2568.9 2765.7,2570.07 3137.92,2570.07 3169.85,2538.13 3542.07,2538.13 3734.51,2730.58 3754.2,2730.58 CN23.5@3779.53,2755.91
NetCN23_6: CN23.6 U7.9 | length 1458.4
  Top Layer w8: v2(2714.57,2455.9) 2714.65,2455.98 2714.65,2495.46 U7.9@2714.72,2495.54
  Inner 2 w8: v2(2714.57,2455.9) v2(2714.57,2613.19)
  Bottom Layer w8: v2(2714.57,2613.19) 2735.24,2633.86 2889.22,2633.86 2936.46,2586.61 3160.43,2586.61 3192.91,2554.13 3505.91,2554.13 3580.71,2628.94 3580.71,2669.29 3733.57,2822.15 3744.16,2822.15 3755.91,2833.9 3755.91,2844.49 3767.32,2855.91 CN23.6@3779.53,2855.91
NetCN23_7: CN23.7 U7.10 | length 1414
  Top Layer w8: U7.10@2734.72,2495.54 2735.43,2494.83 2735.43,2449.56 v2(2737.07,2447.91)
  Inner 2 w8: v2(2737.07,2447.91) 2737.07,2540.47 2734.9,2542.64 2734.9,2632.57 v2(2757.05,2654.72)
  Bottom Layer w8: v2(2757.05,2654.72) 2757.24,2654.53 2790.32,2654.53 2826.96,2691.16 2826.96,2693.1 2860.24,2726.38 2980.1,2726.38 2981.27,2727.55 3074.04,2727.55 3111.04,2764.55 3588.17,2764.55 CN23.7@3779.53,2955.91
NetCN23_8: CN23.8 U7.11 | length 1496.8
  Top Layer w8: U7.11@2753.72,2495.54 2755.22,2494.04 2755.22,2459.26 2757.92,2456.56 2757.92,2450.41 v2(2759.78,2448.55) ; CN23.8@3778.54,3059.06 3779.53,3058.07 CN23.8@3779.53,3055.91
  Inner 2 w8: v2(2759.78,2448.55) 2759.82,2448.59 2763.36,2448.59 2778.54,2463.77 2778.54,2674.56 v2(2777.72,2675.39)
  Bottom Layer w8: v2(2777.72,2675.39) 2762.08,2691.02 2762.08,2707.41 2758.86,2710.63 2827.98,2779.76 2890.99,2779.76 2891.78,2780.55 3501.02,2780.55 3741.01,3020.54 3744.16,3020.54 CN23.8@3779.53,3055.91